# EAGLE board SparkFun RTK Facet - Main (EAGLE 9.6.2)
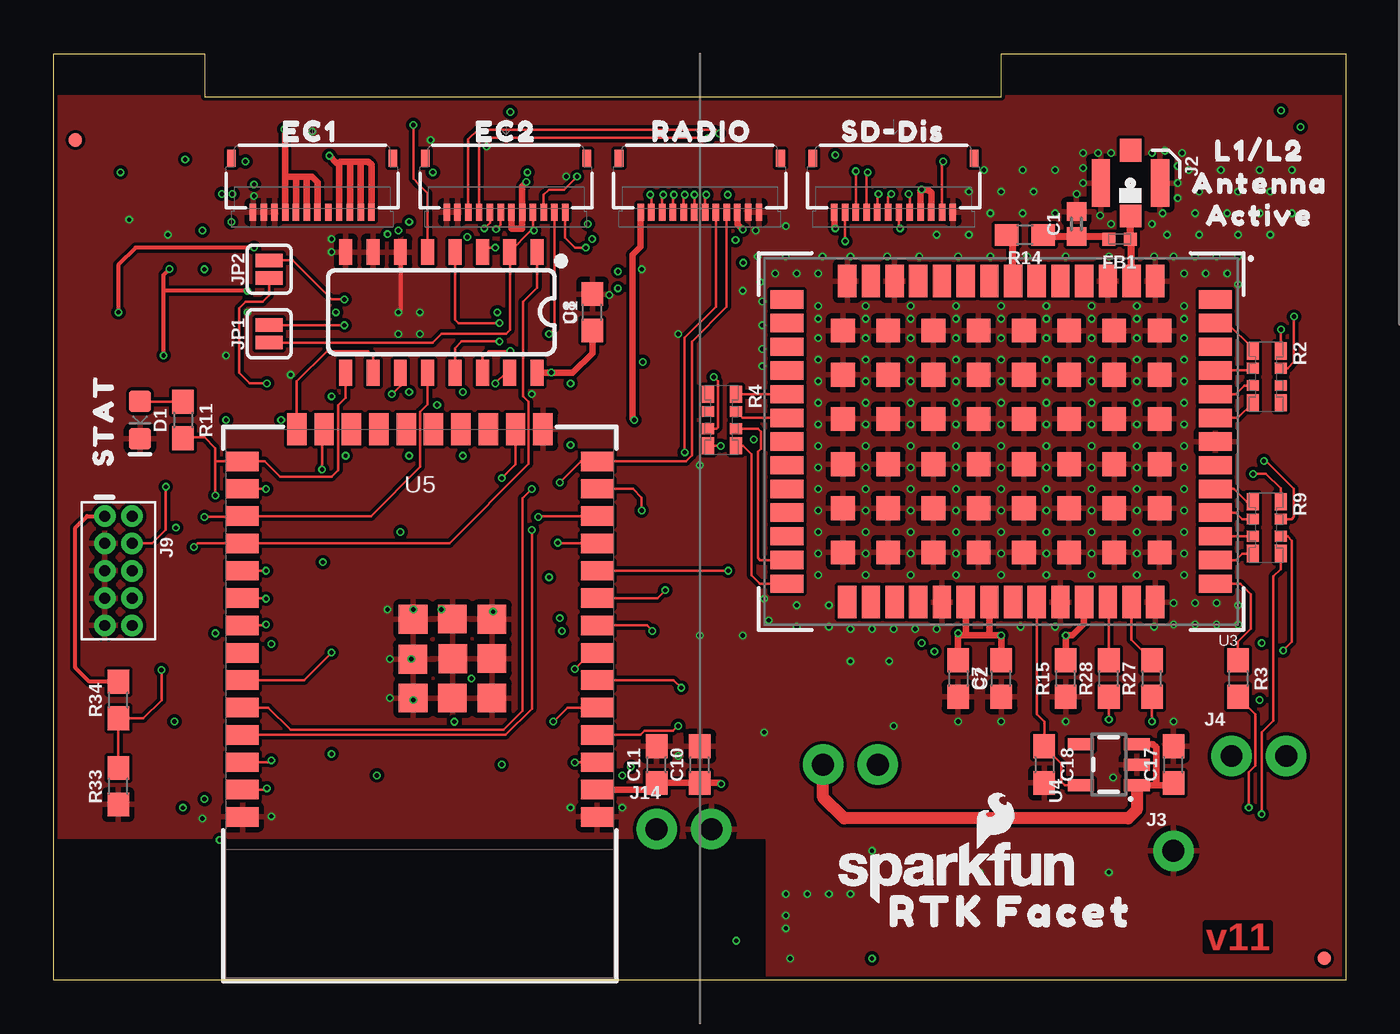
[diagram p0: board, top side]
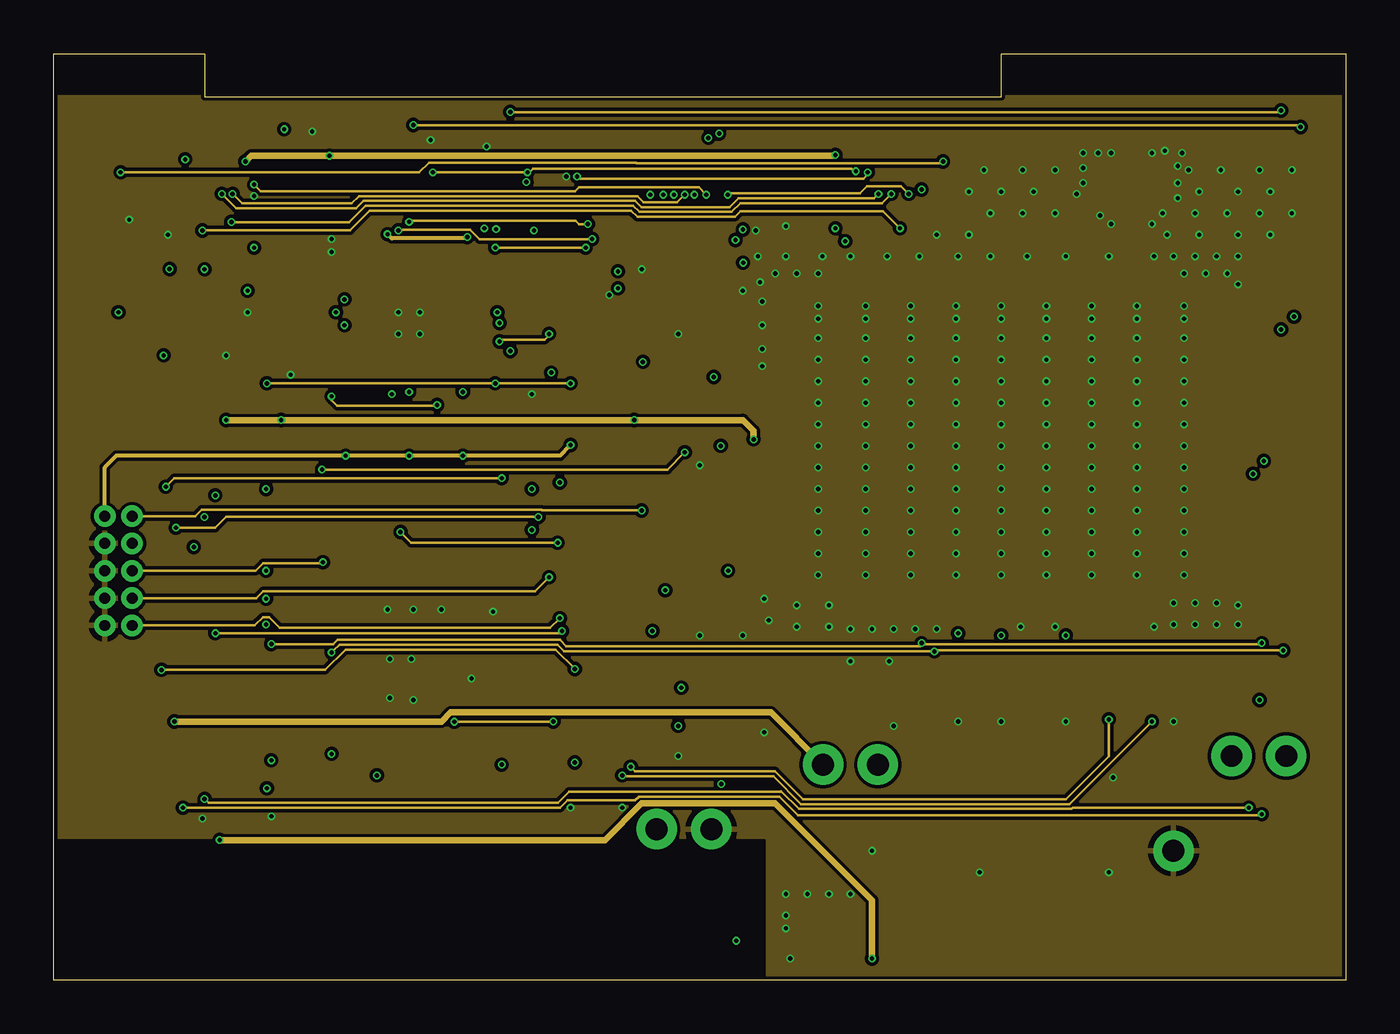
[diagram p1: board, inner layer GND/Horz]
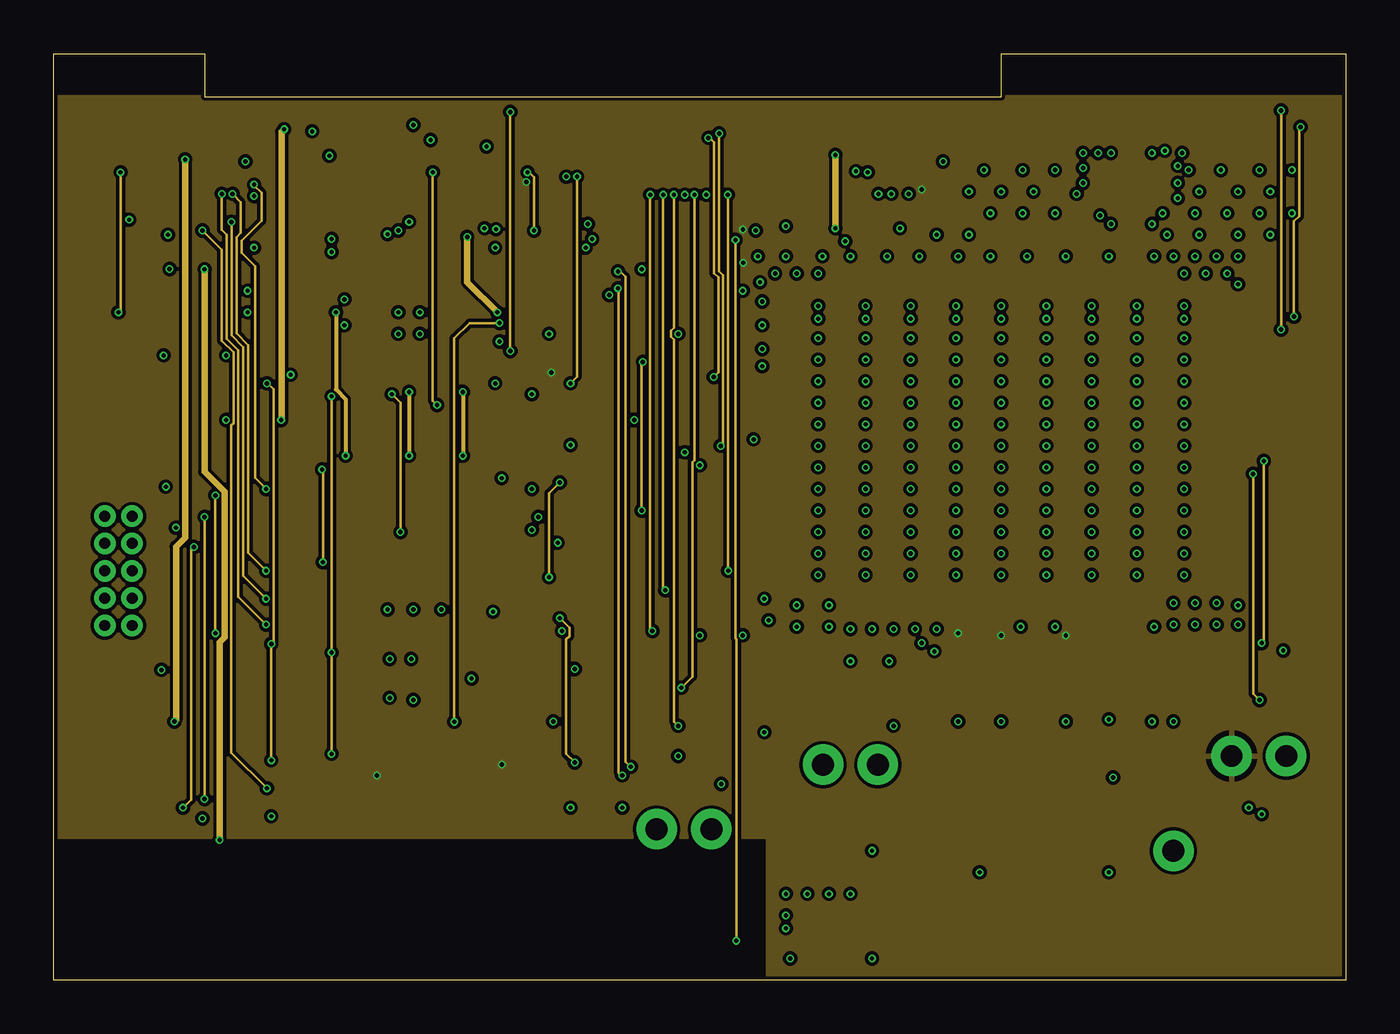
[diagram p2: board, inner layer 3.3V/Vert]
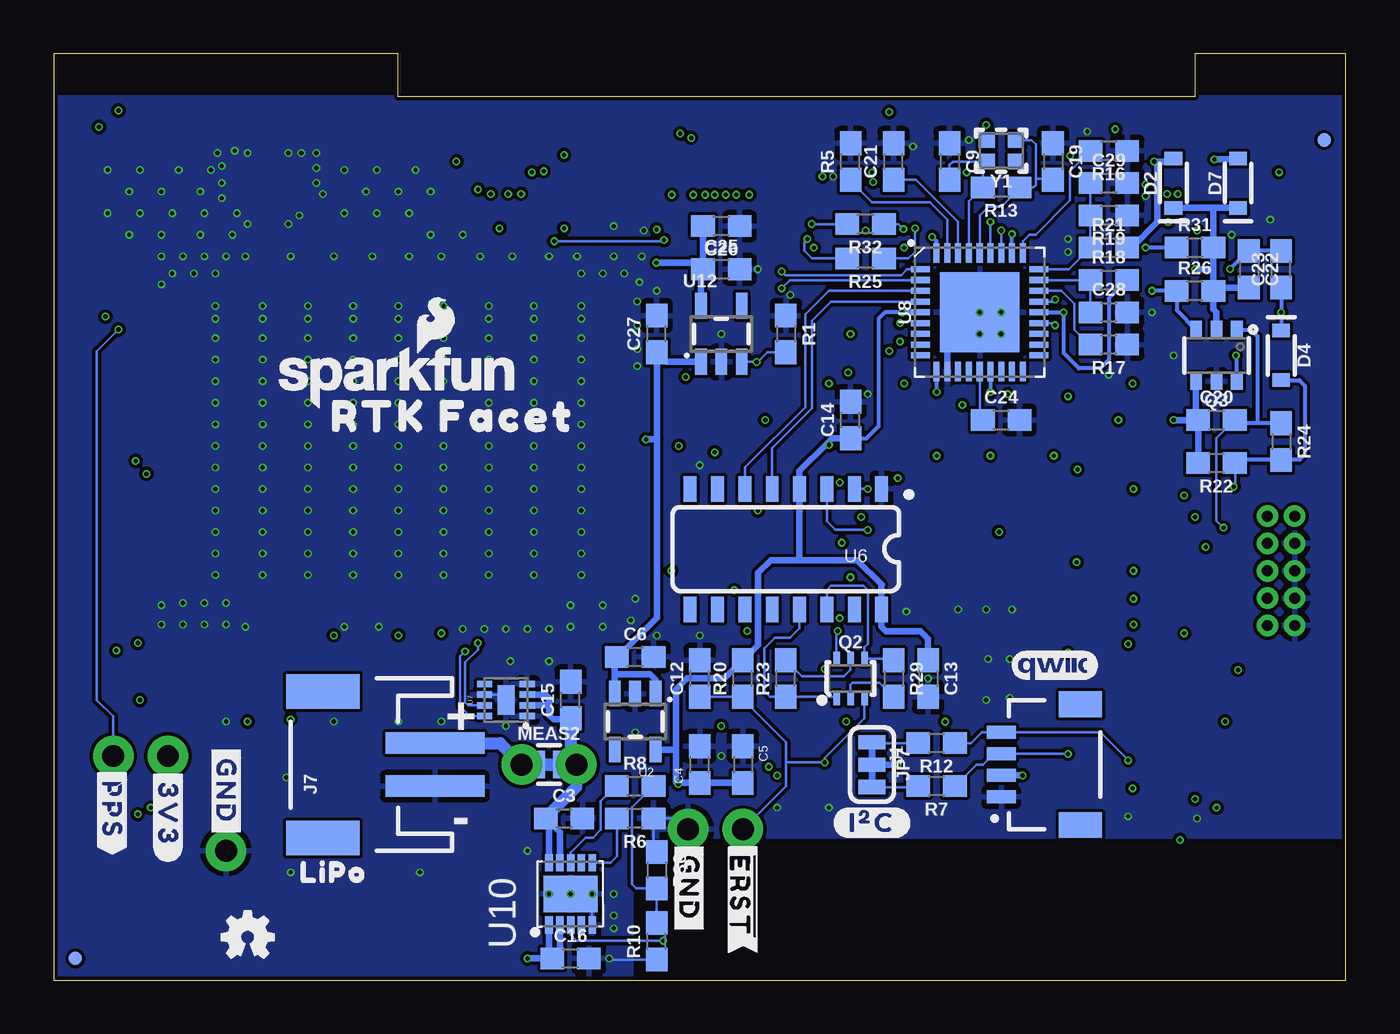
[diagram p3: board, bottom side, seen from below]

Size 60 x 43 mm. Coordinates in mm from the lower left corner, seen from the top.
Outline: 60,43 60,0 0,0 0,43 7,43 7,41 44,41 44,43 60,43
Copper layers (1+2*15+16): Top/Horz 0.035mm / dielectric 1.5mm / GND/Horz 0.035mm / dielectric 0.15mm / 3.3V/Vert 0.035mm / dielectric 0.2mm / Bottom/Vert 0.035mm
Design rules "SparkFun-4-Layer-MicroMod-JLCPCB": minimum track width 4mil, minimum drill 0.2mm, track to track 4mil, track to pad 4mil, pad to pad 4mil, via to via 4mil, smd to smd 4mil, copper to edge 6mil, drill to drill 6mil, minimum pad ring 3mil, minimum via ring 3mil, stop-mask expansion 4mil, vias tented up to drill 25mil, thermal gap 10mil
Net classes: 0 default: width 0 mm, drill 0 mm; 1 power: width 0.178 mm; 2 3.3V: width 0.559 mm; 3 RF: width 0.33 mm, clearance 0.203 mm
tKeepout: area 0,0 to 2,43; area 58,0 to 60,43
bKeepout: area 0,0 to 2,43; area 58,0 to 60,43

## Footprints (pad centres in the part's own frame; a part is rotated, then mirrored left to right if it is on the bottom)
0402 = smd 0.85 x 0.9: 1 -0.58,0; 2 0.58,0
0603 = smd 1.1 x 1: 1 -0.85,0; 2 0.85,0
LED-0603 = smd 1 x 1: A -0.877,0; C 0.877,0
SOD-323 = smd 0.63 x 0.83: A 1.15,0; C -1.15,0
0402-TIGHT = smd 0.6 x 0.6: 1 -0.5,0; 2 0.5,0
JST04_1MM_RA = smd 0.6 x 1.35: 1 -1.5,0; 2 -0.5,0; 3 0.5,0; 4 1.5,0 | smd 1.2 x 2: NC1 2.8,-3.675; NC2 -2.8,-3.675
U.FL = smd 2.2 x 0.85: 1 0,1.375; 2 0,-1.375 | smd 1.05 x 1: FEED 1.525,0; NC -1.525,0
1X01_NO_SILK = drill 1.016 pad 1.88: 1 0,0
1X02_NO_SILK = drill 1.016 pad 1.88: 1 0,0; 2 2.54,0
JST-2-SMD = smd 1 x 4.6: 1 -1,-3.7; 2 1,-3.7 | smd 1.6 x 3.4: NC1 -3.4,1.5; NC2 3.4,1.5
FPC_12_DOUBLESIDED_BACKFLIP = smd 0.3 x 0.8: 1 -2.75,1.35; 2 -2.25,1.35; 3 -1.75,1.35; 4 -1.25,1.35; 5 -0.75,1.35; 6 -0.25,1.35; 7 0.25,1.35; 8 0.75,1.35; 9 1.25,1.35; 10 1.75,1.35; 11 2.25,1.35; 12 2.75,1.35 | smd 0.4 x 0.8: MP1 -3.75,-1.15; MP2 3.75,-1.15
2X5-PTH-1.27MM = drill 0.508 pad 1: 1 -2.54,-0.635; 2 -2.54,0.635; 3 -1.27,-0.635; 4 -1.27,0.635; 5 0,-0.635; 6 0,0.635; 7 1.27,-0.635; 8 1.27,0.635; 9 2.54,-0.635; 10 2.54,0.635
SMT-JUMPER_2_NO_SILK = smd 0.635 x 1.27: 1 -0.406,0; 2 0.406,0
SMT-JUMPER_3_2-NC_TRACE_SILK = smd 0.66 x 1.27: 1 -1.041,0; 2 0,0; 3 1.041,0
FIDUCIAL-MICRO = smd 0.635 x 0.635: 1 0,0
COMBO-JUMPER_2_NC_TRACE = smd 0.635 x 1.27: 1 -0.508,0; 2 0.508,0 | drill 1.016 pad 1.88: 3 -1.27,0; 4 1.27,0
SC70-6 = smd 0.3 x 0.66: 1 -0.65,-0.92; 2 0,-0.92; 3 0.65,-0.92; 4 0.65,0.92; 5 0,0.92; 6 -0.65,0.92
SOT26 = smd 0.55 x 0.8: D1 -0.95,1.2; D2 0.95,1.2; G1 -0.95,-1.2; G2 0.95,-1.2; S1 0,1.2; S2 0,-1.2
1206_RA = smd 0.8 x 0.55: P1 -1.2,-0.62; P4 1.2,-0.62; P5 1.2,0.68; P8 -1.2,0.68 | smd 0.5 x 0.55: P2 -0.4,-0.62; P3 0.4,-0.62; P6 0.4,0.68; P7 -0.4,0.68
SO16 = smd 0.6 x 1.2: 1 -4.445,-2.8; 2 -3.175,-2.8; 3 -1.905,-2.8; 4 -0.635,-2.8; 5 0.635,-2.8; 6 1.905,-2.8; 7 3.175,-2.8; 8 4.445,-2.8; 9 4.445,2.8; 10 3.175,2.8; 11 1.905,2.8; 12 0.635,2.8; 13 -0.635,2.8; 14 -1.905,2.8; 15 -3.175,2.8; 16 -4.445,2.8
SOT23-5 = smd 0.55 x 1.2: 1 -0.95,-1.3; 2 0,-1.3; 3 0.95,-1.3; 4 0.95,1.3; 5 -0.95,1.3
ZED-F9P = smd 0.85 x 1.52: 1 -7.15,-7.45; 2 -6.05,-7.45; 3 -4.95,-7.45; 4 -3.85,-7.45; 5 -2.75,-7.45; 6 -1.65,-7.45; 7 -0.55,-7.45; 8 0.55,-7.45; 9 1.65,-7.45; 10 2.75,-7.45; 11 3.85,-7.45; 12 4.95,-7.45; 13 6.05,-7.45; 14 7.15,-7.45; 28 7.15,7.45; 29 6.05,7.45; 30 4.95,7.45; 31 3.85,7.45; 32 2.75,7.45; 33 1.65,7.45; 34 0.55,7.45; 35 -0.55,7.45; 36 -1.65,7.45; 37 -2.75,7.45; 38 -3.85,7.45; 39 -4.95,7.45; 40 -6.05,7.45; 41 -7.15,7.45 | smd 1.52 x 0.85: 15 9.95,-6.6; 16 9.95,-5.5; 17 9.95,-4.4; 18 9.95,-3.3; 19 9.95,-2.2; 20 9.95,-1.1; 21 9.95,0; 22 9.95,1.1; 23 9.95,2.2; 24 9.95,3.3; 25 9.95,4.4; 26 9.95,5.5; 27 9.95,6.6; 42 -9.95,6.6; 43 -9.95,5.5; 44 -9.95,4.4; 45 -9.95,3.3; 46 -9.95,2.2; 47 -9.95,1.1; 48 -9.95,0; 49 -9.95,-1.1; 50 -9.95,-2.2; 51 -9.95,-3.3; 52 -9.95,-4.4; 53 -9.95,-5.5; 54 -9.95,-6.6 | smd 1.1 x 1.1: 55 -1.05,-1.05; 56 -3.15,-1.05; 57 -5.25,-1.05; 58 -7.35,-1.05; 59 -1.05,-3.1; 60 -3.15,-3.1; 61 -5.25,-3.1; 62 -7.35,-3.1; 63 -1.05,-5.15; 64 -3.15,-5.15; 65 -5.25,-5.15; 66 -7.35,-5.15; 67 -1.05,5.15; 68 -3.15,5.15; 69 -5.25,5.15; 70 -7.35,5.15; 71 -1.05,3.1; 72 -3.15,3.1; 73 -5.25,3.1; 74 -7.35,3.1; 75 -1.05,1.05; 76 -3.15,1.05; 77 -5.25,1.05; 78 -7.35,1.05; 79 1.05,1.05; 80 3.15,1.05; 81 5.25,1.05; 82 7.35,1.05; 83 1.05,3.1; 84 3.15,3.1; 85 5.25,3.1; 86 7.35,3.1; 87 1.05,5.15; 88 3.15,5.15; 89 5.25,5.15; 90 7.35,5.15; 91 1.05,-5.15; 92 3.15,-5.15; 93 5.25,-5.15; 94 7.35,-5.15; 95 1.05,-3.1; 96 3.15,-3.1; 97 5.25,-3.1; 98 7.35,-3.1; 99 1.05,-1.05; 100 3.15,-1.05; 101 5.25,-1.05; 102 7.35,-1.05
ESP-WROOM-32D-NARROW = smd 0.9 x 1.5: 1 6.43,8.238; 2 5.16,8.238; 3 3.89,8.238; 4 2.62,8.238; 5 1.35,8.238; 6 0.08,8.238; 7 -1.19,8.238; 8 -2.46,8.238; 9 -3.73,8.238; 10 -5,8.238; 11 -6.27,8.238; 12 -7.54,8.238; 13 -8.81,8.238; 14 -10.08,8.238; 25 -10.08,-8.238; 26 -8.81,-8.238; 27 -7.54,-8.238; 28 -6.27,-8.238; 29 -5,-8.238; 30 -3.73,-8.238; 31 -2.46,-8.238; 32 -1.19,-8.238; 33 0.08,-8.238; 34 1.35,-8.238; 35 2.62,-8.238; 36 3.89,-8.238; 37 5.16,-8.238; 38 6.43,-8.238 | smd 1.5 x 0.9: 15 -11.57,5.715; 16 -11.57,4.445; 17 -11.57,3.175; 18 -11.57,1.905; 19 -11.57,0.635; 20 -11.57,-0.635; 21 -11.57,-1.905; 22 -11.57,-3.175; 23 -11.57,-4.445; 24 -11.57,-5.715 | smd 1.33 x 1.33: GND1 -0.912,1.531; GNDT1 -2.751,3.346; GNDT2 -2.761,1.516; GNDT3 -2.751,-0.314; GNDT4 -0.891,-0.324; GNDT5 0.909,-0.314; GNDT6 0.909,1.516; GNDT7 0.909,3.346; GNDT8 -0.921,3.346
SO016 = smd 0.6 x 1.2: 1 -4.445,-2.8; 2 -3.175,-2.8; 3 -1.905,-2.8; 4 -0.635,-2.8; 5 0.635,-2.8; 6 1.905,-2.8; 7 3.175,-2.8; 8 4.445,-2.8; 9 4.445,2.8; 10 3.175,2.8; 11 1.905,2.8; 12 0.635,2.8; 13 -0.635,2.8; 14 -1.905,2.8; 15 -3.175,2.8; 16 -4.445,2.8
DFN-8 = smd 0.3 x 0.7: 1 -0.75,-0.99; 2 -0.25,-0.99; 3 0.25,-0.99; 4 0.75,-0.99; 5 0.75,0.99; 6 0.25,0.99; 7 -0.25,0.99; 8 -0.75,0.99 | smd 1.38 x 0.8: 9 0,0
QFN-36 = smd 0.9 x 0.28: 1 -2.75,2; 2 -2.75,1.5; 3 -2.75,1; 4 -2.75,0.5; 5 -2.75,0; 6 -2.75,-0.5; 7 -2.75,-1; 8 -2.75,-1.5; 9 -2.75,-2; 19 2.75,-2; 20 2.75,-1.5; 21 2.75,-1; 22 2.75,-0.5; 23 2.75,0; 24 2.75,0.5; 25 2.75,1; 26 2.75,1.5; 27 2.75,2 | smd 0.28 x 0.9: 10 -2,-2.75; 11 -1.5,-2.75; 12 -1,-2.75; 13 -0.5,-2.75; 14 0,-2.75; 15 0.5,-2.75; 16 1,-2.75; 17 1.5,-2.75; 18 2,-2.75; 28 2,2.75; 29 1.5,2.75; 30 1,2.75; 31 0.5,2.75; 32 0,2.75; 33 -0.5,2.75; 34 -1,2.75; 35 -1.5,2.75; 36 -2,2.75 | smd 3.7 x 3.7: EP 0,0
DFN-10 = smd 0.8 x 0.35: 1 -1.45,1; 2 -1.45,0.5; 3 -1.45,0; 4 -1.45,-0.5; 5 -1.45,-1; 6 1.45,-1; 7 1.45,-0.5; 8 1.45,0; 9 1.45,0.5; 10 1.45,1 | smd 1.7 x 2.5: 11 0,0
CRYSTAL-SMD-2.0X1.6MM = smd 0.75 x 0.7: 1 -0.675,-0.5; 2 0.675,-0.5; 3 0.675,0.5; 4 -0.675,0.5

## Placement (x,y rotation side)
C1  47pF  [0402]  47.5,35.1 90 top
C2  1.0uF  [0603]  42,14 270 top
C3  4.7uF  [0603]  36.3,7.5 0 bottom
C4  1.0uF  [0603]  30,10 90 bottom
C5  0.1uF  [0603]  28,10 270 bottom
C6  1.0uF  [0603]  33,15 0 bottom
C7  0.1uF  [0603]  44,14 90 top
C8  0.1uF  [0603]  25.01,31 90 top
C9  18pF  [0603]  18.4,38 270 bottom
C10  10uF  [0603]  30,10 90 top
C11  0.1uF  [0603]  28,10 90 top
C12  0.1uF  [0603]  30,14 90 bottom
C13  0.1uF  [0603]  19.4,14 270 bottom
C14  10uF  [0603]  23,26 90 bottom
C15  0.1uF  [0603]  36,13 90 bottom
C16  4.7uF  [0603]  36,1 0 bottom
C17  1.0uF  [0603]  52,10 90 top
C18  1.0uF  [0603]  46,10 270 top
C19  18pF  [0603]  13.6,38 270 bottom
C20  22uF  [0603]  6,26 0 bottom
C21  0.1uF  [0603]  21,38 90 bottom
C22  0.1uF  [0603]  4.5,33 270 bottom
C23  0.1uF  [0603]  3,33 90 bottom
C24  0.1uF  [0603]  16,26 0 bottom
C25  1.0uF  [0603]  29,33 0 bottom
C26  0.1uF  [0603]  29,35 180 bottom
C27  1.0uF  [0603]  32,30 90 bottom
C28  0.1uF  [0603]  11,31 0 bottom
C29  0.1uF  [0603]  11,37 0 bottom
D1  Yellow  [LED-0603]  4,26 270 top
D2  3A/10V/280mV  [SOD-323]  8,37 90 bottom
D4  250mA/100V  [SOD-323]  3,29 270 bottom
D7  3A/10V/280mV  [SOD-323]  5,37 90 bottom
FB1  2.66Ω  [0402-TIGHT]  49.5,34.4 180 top
FRAME1  FRAME-LEDGER  [CREATIVE_COMMONS]  82.04,6 0 top  (outside the outline)
FRAME2  FRAME-LEDGER  [CREATIVE_COMMONS]  82.04,6 0 top  (outside the outline)
J1  QWIIC_RIGHT_ANGLE  [JST04_1MM_RA]  16,10 90 bottom
J2  U.FL  [U.FL]  50,37 270 top
J3  [1X01_NO_SILK]  52,6 0 top
J4  [1X02_NO_SILK]  54.7,10.4 0 top
J7  [JST-2-SMD]  46,10 90 bottom
J8  [FPC_12_DOUBLESIDED_BACKFLIP]  39,37 180 top
J9  CORTEX_JTAG_DEBUG_PTH  [2X5-PTH-1.27MM]  3,19 270 top
J10  [FPC_12_DOUBLESIDED_BACKFLIP]  30,37 180 top
J14  [1X02_NO_SILK]  28,7 0 top
J15  [FPC_12_DOUBLESIDED_BACKFLIP]  12,37 180 top
J18  [FPC_12_DOUBLESIDED_BACKFLIP]  21,37 180 top
JP1  [SMT-JUMPER_2_NO_SILK]  10,30 90 top
JP2  [SMT-JUMPER_2_NO_SILK]  10,33 90 top
JP7  JUMPER-SMT_3_2-NC_TRACE_SILK  [SMT-JUMPER_3_2-NC_TRACE_SILK]  22,10 270 bottom
JP21  FIDUCIALUFIDUCIAL  [FIDUCIAL-MICRO]  59,1 0 top
JP61  FIDUCIALUFIDUCIAL  [FIDUCIAL-MICRO]  1,39 0 top
JP71  FIDUCIALUFIDUCIAL  [FIDUCIAL-MICRO]  59,1 0 bottom
JP81  FIDUCIALUFIDUCIAL  [FIDUCIAL-MICRO]  1,39 0 bottom
LOGO1  OSHW-LOGOMINI  [OSHW-LOGO-MINI]  51,2 0 bottom
LOGO2  SFE_LOGO_NAME_FLAME.1_INCH  [SFE_LOGO_NAME_FLAME_.1]  42,5 0 top
LOGO3  SFE_LOGO_NAME_FLAME.1_INCH  [SFE_LOGO_NAME_FLAME_.1]  44,28 0 bottom
MEAS2  [COMBO-JUMPER_2_NC_TRACE]  37,10 0 bottom
Q2  MBT3904DW1T1  [SC70-6]  23,14 0 bottom
Q3  SIL2308  [SOT26]  6,29 180 bottom
R1  100k  [0603]  26,30 270 bottom
R2  33  [1206_RA]  56.3,28 270 top
R3  33  [0603]  55,14 270 top
R4  33  [1206_RA]  31,26 270 top
R5  12k  [0603]  23,38 90 bottom
R6  1k  [0603]  33,7.5 180 bottom
R7  2.2k  [0603]  19,9 180 bottom
R8  0  [0603]  33,9 0 bottom
R9  33  [1206_RA]  56.3,21 270 top
R10  10k  [0603]  32,1.8 90 bottom
R11  1k  [0603]  6,26 270 top
R12  2.2k  [0603]  19,11 180 bottom
R13  1M  [0603]  16,36.8 180 bottom
R14  10  [0603]  45.1,34.6 180 top
R15  100k  [0603]  47,14 90 top
R16  100k  [0603]  11,38.5 180 bottom
R17  100k  [0603]  11,29.5 180 bottom
R18  100k  [0603]  11,32.5 0 bottom
R19  100k  [0603]  11,35.5 180 bottom
R20  10k  [0603]  28,14 90 bottom
R21  100k  [0603]  11,34 0 bottom
R22  10k  [0603]  6,24 180 bottom
R23  10k  [0603]  26,14 90 bottom
R24  300k  [0603]  3,25 270 bottom
R25  22  [0603]  22.3,33.5 180 bottom
R26  100k  [0603]  7,32 0 bottom
R27  27  [0603]  51,14 90 top
R28  27  [0603]  49,14 90 top
R29  10k  [0603]  21,14 270 bottom
R30  150k  [0603]  32,5.1 270 bottom
R31  10k  [0603]  7,34 0 bottom
R32  22  [0603]  22.3,35.1 180 bottom
R33  10k  [0603]  3,9 90 top
R34  10k  [0603]  3,13 90 top
U1  74HC4052D  [SO16]  18,31 180 top
U2  3.3V  [SOT23-5]  33,12 180 bottom
U3  U-BLOX_ZED-F9P  [ZED-F9P]  44,25 180 top
U4  STLQ015  [SOT23-5]  49,10 90 top
U5  ESP-WROOM-3232D-NARROW  [ESP-WROOM-32D-NARROW]  17,14 270 top
U6  CH340C  [SO016]  26,20 180 bottom
U7  MAX17048  [DFN-8]  39,13 90 bottom
U8  USB251XB  [QFN-36]  17,31 0 bottom
U10  MCP73833  [DFN-10]  36,4 90 bottom
U12  AP2112K-3.3  [SOT23-5]  29,30 0 bottom
U$1  [LIPO0]  47,5 0 bottom
U$2  SPECIAL_INSTRUCTIONS-ORDERING  [ORDERING_INSTRUCTIONS]  62.54,81.28 0 top  (outside the outline)
U$3  [EC21]  21,39.4 0 top
U$4  [SD#DIS0]  39,39.4 0 top
U$5  [ACTIVE1]  56,35.5 0 top
U$6  [#3V3#0]  54.7,7.7 270 bottom
U$7  [ANTENNA2]  56,37 0 top
U$8  [EC10]  11.9,39.4 0 top
U$9  [L1#L20]  56,38.5 0 top
U$10  [#PPS#1]  57.3,7.9 270 bottom
U$11  [RTK_FACET0]  44.45,3.17 0 top
U$12  [RADIO0]  30.1,39.4 0 top
U$13  [RTK_FACET0]  41.45,26.18 0 bottom
U$14  [#GND#1]  52,11 270 bottom
U$24  [STAT0]  2.3,26 90 top
U$25  [#I�C#0]  22,7.3 0 bottom
U$26  [##ERST##0]  28,3.9 270 bottom
U$30  [QWIIC_4MM]  13.5,14.6 0 bottom
U$84  [#GND#1]  30.5,6.5 270 bottom
Y1  24MHz  [CRYSTAL-SMD-2.0X1.6MM]  16,38.5 180 bottom

## Library data of the parts
C1 = SparkFun-Capacitors; PROD_ID: CAP-15063
C2 C4 C6 C17 C18 C25 C27 = SparkFun-Capacitors; PROD_ID: CAP-13930
C3 C16 = SparkFun-Capacitors; PROD_ID: CAP-14106
C5 C7 C21-C24 C26 C28 C29 = SparkFun-Capacitors; PROD_ID: CAP-08604
C8 C11-C13 C15 = SparkFun-Capacitors; PROD_ID: CAP-00810
C9 C19 = SparkFun-Capacitors; PROD_ID: CAP-08267
C10 C14 = SparkFun-Capacitors; PROD_ID: CAP-11015
C20 = SparkFun-Capacitors; PROD_ID: CAP-14464
D1 = SparkFun-LED; PROD_ID: DIO-09003
D2 D7 = SparkFun-DiscreteSemi; PROD_ID: DIO-14072
D4 = SparkFun-DiscreteSemi; PROD_ID: DIO-09646
FB1 = SparkFun-Coils; PROD_ID: NDUC-15072
FRAME1 FRAME2 JP21 JP61 JP71 JP81 LOGO1-LOGO3 U$2 U$30 = SparkFun-Aesthetics
J1 = SparkFun-Connectors; PROD_ID: CONN-13694
J2 = SparkFun-Connectors; PROD_ID: CONN-09193; SF_ID: WRL-09144
J3 J4 J9 J14 = SparkFun-Connectors
J7 = SparkFun-Connectors; PROD_ID: CONN-11443; SF_ID: PRT-08612
J8 J10 J15 J18 = RTK Facet; PROD_ID: CONN-15766
JP1 JP2 JP7 MEAS2 = SparkFun-Jumpers
Q2 = SparkFun-DiscreteSemi; PROD_ID: TRANS-13337
Q3 = SparkFun-DiscreteSemi; PROD_ID: TRANS-15717
R1 R15-R19 R21 R26 = SparkFun-Resistors; PROD_ID: RES-07828
R2 R4 R9 = SparkFun-Resistors; PROD_ID: RES-15081
R3 = SparkFun-Resistors; PROD_ID: RES-08270
R5 = SparkFun-Resistors; PROD_ID: RES-10327
R6 R11 = SparkFun-Resistors; PROD_ID: RES-07856
R7 R12 = SparkFun-Resistors; PROD_ID: RES-08272
R8 = SparkFun-Resistors; PROD_ID: RES-08609
R10 = SparkFun-Resistors; PROD_ID: RES-13608
R13 = SparkFun-Resistors; PROD_ID: RES-07868
R14 = SparkFun-Resistors; PROD_ID: RES-12581
R20 R22 R23 R29 R31 R33 R34 = SparkFun-Resistors; PROD_ID: RES-00824
R24 = SparkFun-Resistors; PROD_ID: RES-10809
R25 R32 = SparkFun-Resistors; PROD_ID: RES-08698
R27 R28 = SparkFun-Resistors; PROD_ID: RES-09334
R30 = SparkFun-Resistors; PROD_ID: RES-09117
U1 = SparkFun-IC-Logic; PROD_ID: IC-13103
U2 U12 = SparkFun-IC-Power; PROD_ID: VREG-12457
U3 = SparkFun-GPS; PROD_ID: IC-14209
U4 = SparkFun-IC-Power; PROD_ID: IC-15779
U5 = SparkFun-RF; PROD_ID: IC-15676
U6 = SparkFun-IC-Comms; PROD_ID: IC-14038
U7 = SparkFun-IC-Power; PROD_ID: IC-12551
U8 = USB251xB; PROD_ID: IC-15827
U10 = SparkFun-IC-Power; PROD_ID: IC-14369
U$1 U$3-U$14 U$24-U$26 U$84 = output
Y1 = SparkFun-Clocks; PROD_ID: XTAL-14845

## Nets
3.3V [power]: C2.1 C7.2 C8.1 C25.1 C26.2 J1.2 J4.1 J8.3 J8.4 J10.3 J18.5 J18.6 JP7.2 R15.2 U1.16 U3.33 U3.34 U3.38 U12.5
ANT_VCC: C1.1 FB1.2 R14.1
CHG_LED: J8.11 U10.3
CHG_THERM1: R8.2 R10.2 R30.2
ESP32_!DTR: Q2.1 R23.1 U6.13
ESP32_!RTS: Q2.4 R29.1 U6.14
ESP32_EN: C12.1 J9.10 J14.1 Q2.3 R20.1 U5.3
ESP32_RXI: U5.34 U6.2
ESP32_TXO: U5.35 U6.3
ESP_0/BOOT/STAT_LED/MUX_B: Q2.6 R11.2 U1.9 U5.25
ESP_2/MUX_A: U1.10 U5.24
ESP_3V3 [power]: C4.1 C5.2 C10.1 C11.1 C13.1 C14.1 J9.1 R18.2 R20.2 R34.2 U2.5 U5.2 U6.4 U6.16 U8.5 U8.10 U8.15 U8.23 U8.29 U8.36
ESP_4/RADIO_PWR_ON: J10.6 U5.26
ESP_5/RADIO_CTSI: J10.8 U5.29
ESP_12/MTDI/RADIO_NI: J9.8 J10.4 U5.14
ESP_13/POWER_CTRL/MTCK: D4.A J9.4 R22.1 R24.2 U5.16
ESP_14/PERIPHERAL_POWER/MTMS: J9.2 R1.2 U5.13 U12.3
ESP_15/MTDO/RADIO_!RESET!: J9.6 J10.5 U5.23
ESP_16/ZED-TXO1: R3.2 U1.12 U5.27
ESP_17/ZED-RXI1: R9.P5 U1.1 U5.28
ESP_18/SD_SCK: J8.7 U5.30
ESP_19/SD_CIPO: J8.8 U5.31
ESP_21/SDA: J1.3 J8.10 J18.4 JP1.1 R7.1 R9.P6 U1.2 U5.33 U7.8
ESP_22/SCL: J1.4 J8.9 J18.3 JP2.1 R9.P7 R12.1 U1.15 U5.36 U7.7
ESP_23/SD_COPI: J8.6 U5.37
ESP_25/SD_!CS!: J8.5 U5.10
ESP_26/DAC2: U1.11 U5.11
ESP_27/FAST_OFF: C20.2 Q3.G1 R24.1 U5.12
ESP_32/RADIO_TXO: J10.11 U5.8
ESP_33/RADIO_RXI: J10.10 U5.9
ESP_DM: U6.6 U8.3
ESP_DP: U6.5 U8.4
ESP_I34/RADIO_INT: J10.7 U5.6
ESP_I35/DEVICE_SENSE: R33.2 R34.1 U5.7
ESP_I36/RADIO_RTSO: J10.9 U5.4
ESP_I39/ADC39: U1.4 U5.5
EXTERNAL_SERIAL1_RXI: J18.1 U1.3
EXTERNAL_SERIAL1_TXO: J18.2 U1.13
FENCE_LV: R4.P8 U3.19
GND: C1.2 C2.2 C3.2 C4.2 C5.1 C6.2 C7.1 C8.2 C9.1 C10.2 C11.2 C12.2 C13.2 C14.2 C15.2 C16.2 C17.2 C18.2 C19.1 C21.2 C24.2 C25.2 C26.1 C27.2 C28.2 C29.2 D1.C J1.1 J2.1 J2.2 J3.1 J7.1 J8.1 J9.3 J9.5 J9.7 J9.9 J10.1 J10.2 J14.2 J15.10 J15.11 J15.12 J18.11 J18.12 Q3.S1 R1.1 R5.2 R6.1 R10.1 R15.1 R16.1 R17.1 R19.1 R30.1 R33.1 U1.6 U1.7 U1.8 U2.2 U3.1 U3.3 U3.12 U3.14 U3.32 U3.37 U3.41 U3.48 U3.55 U3.56 U3.57 U3.58 U3.59 U3.60 U3.61 U3.62 U3.63 U3.64 U3.65 U3.66 U3.67 U3.68 U3.69 U3.70 U3.71 U3.72 U3.73 U3.74 U3.75 U3.76 U3.77 U3.78 U3.79 U3.80 U3.81 U3.82 U3.83 U3.84 U3.85 U3.86 U3.87 U3.88 U3.89 U3.90 U3.91 U3.92 U3.93 U3.94 U3.95 U3.96 U3.97 U3.98 U3.99 U3.100 U3.101 U3.102 U4.2 U5.1 U5.15 U5.38 U5.GND1 U5.GNDT1 U5.GNDT2 U5.GNDT3 U5.GNDT4 U5.GNDT5 U5.GNDT6 U5.GNDT7 U5.GNDT8 U6.1 U7.1 U7.4 U7.6 U7.9 U8.11 U8.EP U10.5 U10.11 U12.2
GPS_ANT1 [RF]: FB1.1 J2.FEED U3.2
LIPO_RAW: J7.2 MEAS2.1 MEAS2.3
N$1: R8.1 U10.8
N$2: D1.A R11.1
N$3: JP7.3 R7.2
N$4: JP7.1 R12.2
N$5: R2.P2 U3.51
N$6: C22.1 C23.2 Q3.D1 Q3.G2 R26.1
N$7: C9.2 R13.2 U8.33 Y1.3
N$8: C19.2 R13.1 U8.32 Y1.1
N$9: R5.1 U8.35
N$10: R16.2 U8.28
N$11: R27.2 U3.40
N$12: R28.2 U3.39
N$13: R14.2 U3.7
N$14: R17.2 U8.25
N$15: C21.1 U8.34
N$16: R2.P4 U3.49
N$17: C24.1 U8.14
N$18: R2.P3 U3.50
N$19: R25.2 U8.30
N$20: R32.2 U8.31
N$21: JP1.2 U8.22
N$22: R9.P1 U3.46
N$23: JP2.2 U8.24
N$24: Q2.5 R23.2
N$25: Q2.2 R29.2
POWER_BTN: C23.1 D4.C J8.2 R31.1
PPS: R2.P1 U3.53
PROG1: R6.2 U10.6
RTK_LV: R4.P7 U3.20
RX2_LV: R4.P6 U3.26
RXLV: R9.P4 U3.43
SCL_LV: R9.P2 U3.45
SDA_LV: R9.P3 U3.44
TX2_LV: R4.P5 U3.27
TXLV: R3.1 U3.42
USB_!RESET: C28.1 R18.1 U8.26
USB_DM: J18.8 R25.1
USB_DP: J18.7 R32.1
V_BATT [power]: C3.1 C15.1 C17.1 D7.A MEAS2.2 MEAS2.4 U4.1 U4.3 U7.2 U7.3 U10.9 U10.10
V_RAW [power]: C16.1 C22.2 D2.C D7.C Q3.S2 R26.2 R31.2 U10.1 U10.2
V_USB [power]: D2.A J8.12 J15.1 J15.2 J15.3 J15.4 R21.2
VBUS_DET: C29.1 R19.2 R21.1 U8.27
VOUT [power]: C6.1 C20.1 C27.1 J10.12 J15.6 J15.7 J15.8 J15.9 Q3.D2 R22.2 U2.1 U2.3 U12.1
ZED-RXI2: J18.9 R4.P3
ZED-TXO2: J18.10 R4.P4
ZED_!RESET!: R2.P5
ZED_!SAFE!: R2.P6
ZED_BACKUP: C18.1 U3.36 U4.5
ZED_DM: R28.1 U8.1
ZED_DP: R27.1 U8.2
ZED_EXTINT: R2.P7 U1.5
ZED_FENCE_STAT: R4.P1
ZED_PPS_STAT: J4.2 R2.P8 U1.14
ZED_RTK_STAT: R4.P2
ZED_TX_READY: R9.P8

## Tracks (layer width: path | path; a pad name or v marks a point on that pad's centre or on a via)
3.3V  (via drill 0.2)
  Top/Horz 0.305: U1.16 v23.1,28.2 24.1,28.2 25.01,29.11 C8.1 | C2.1 v42,16.1 42.1,16 42.4,16 | C7.2 v44,16 43.5,16 | 42.4,16 43.5,16 | 42.4,16 42.35,16.05 U3.33 | 43.5,16 43.45,16.05 U3.34 | U3.38 47.85,16.55 47.3,16 v47,16 R15.2 | v21.94,37.04 21.75,36.85 J18.5 21.75,34.87 21.27,34.87 21.25,34.89 J18.6 | J8.4 40.25,36.65 v40.3,36.7 40.6,36.7 40.75,36.55 J8.3 | J10.3 31.75,35.09 v32,34.84
  Bottom/Vert 0.305: C26.2 29.85,33.3 | 29.85,33.3 C25.1 29.95,32.9 U12.5 | v32.02,33.3 29.85,33.3 | J1.2 v15,9.5 | JP7.2 v20.8,10
  pour 3.3V/Vert (isolate 0.152, rank 4): 0,41 60,41 60,0 0,0
ANT_VCC
  Top/Horz 0.305: R14.1 46.03,34.52 | 48.88,34.52 FB1.2
  Top/Horz 0.33: 46.03,34.52 C1.1 48.88,34.52
CHG_LED  (via drill 0.2)
  Top/Horz 0.127: v36.75,34.3 J8.11
  3.3V/Vert 0.127: v31.7,1.82 31.7,15.82 31.66,15.86 v31.66,34.36
  Bottom/Vert 0.127: U10.3 36,2.1 35.72,1.82 v31.7,1.82 | v31.66,34.36 31.72,34.3 v36.75,34.3
CHG_THERM1
  Bottom/Vert 0.127: R10.2 R30.2 32.95,4.25 33.13,4.43 33.13,8.02 R8.2
ESP32_!DTR
  Bottom/Vert 0.127: Q2.1 23.72,13.15 R23.1 26.75,13.15 27,13.4 27,15.4 26.5,15.9 25.8,15.9 25.36,16.34 U6.13
ESP32_!RTS
  Bottom/Vert 0.127: R29.1 21.07,14.92 Q2.4 22.35,15.46 22.2,15.61 22.2,18.1 22.4,18.3 23.9,18.3 24.09,18.11 U6.14
ESP32_EN  (via drill 0.2)
  Top/Horz 0.127: U5.3 25.23,10.1 v24.2,10.1
  GND/Horz 0.127: J9.10 9.34,16.46 9.72,16.84 10,16.84 10.48,16.36 23.06,16.36 v23.5,16.8
  3.3V/Vert 0.127: v23.5,16.8 23.94,16.36 23.94,15.96 23.8,15.82 23.8,10.5 v24.2,10.1
  Bottom/Vert 0.127: R20.1 28.1,13.15 | 28.1,13.15 C12.1 | 28.1,13.15 26,11.05 26,10.1 | 26,10.1 v24.2,10.1 24.2,10.3 22.35,12.15 Q2.3 | 26,10.1 26,9 J14.1
ESP32_RXI  (via drill 0.2)
  Top/Horz 0.127: v22.2,22.8 21.77,22.37 21.77,12.49 20.89,11.61 10.99,11.61 9.95,12.65 U5.34
  Bottom/Vert 0.127: v22.2,22.8 U6.2
ESP32_TXO  (via drill 0.2)
  Top/Horz 0.127: v22.2,20.9 22.2,12.6 20.98,11.38 U5.35
  Bottom/Vert 0.127: v22.2,20.9 23.7,20.9 24.09,21.3 U6.3
ESP_0/BOOT/STAT_LED/MUX_B  (via drill 0.2)
  Top/Horz 0.127: R11.2 6.05,25.2 7,25.2 7.5,24.7 7.5,24.1 | v7.5,22.5 7.5,24.1 | 7.5,24.1 7.52,24.08 U5.25 9.8,24.08 10.52,23.36 12.9,23.36 13.21,23.67 13.21,26.69 13.55,27.03 U1.9
  GND/Horz 0.127: v23.6,16.2 23.5,16.1 v7.5,16.1
  3.3V/Vert 0.127: v7.5,16.1 v7.5,22.5
  Bottom/Vert 0.127: v23.6,16.2 23.65,16.15 Q2.6
ESP_2/MUX_A
  Top/Horz 0.127: U5.24 11.29,27.8 12.68,29.2 14.6,29.2 14.82,28.98 U1.10
ESP_3V3  (via drill 0.2)
  Top/Horz 0.178: R34.2 1.65,13.85 1,14.5 1,21 1.54,21.54 J9.1
  Top/Horz 0.305: v31,9.1 30.95,9.15 C10.1 C11.1 27.69,8.84 U5.2
  GND/Horz 0.178: J9.1 2.37,23.8 2.91,24.34 v13.55,24.34 v16.5,24.34 v19,24.34 23.5,24.34 v24,24.84 | v19.2,34.5 19.2,34.48 19.15,34.43 15.69,34.43 v15.5,34.63
  3.3V/Vert 0.178: v13.1,31 13.1,27.42 13.55,26.97 v13.55,24.34 | v16.5,27.3 v16.5,24.34 | v19,27.3 v19,24.34
  3.3V/Vert 0.305: v19.2,34.5 19.2,32.4 v20.6,31
  Bottom/Vert 0.178: U8.10 v19,27.3 | C14.1 22.25,25.15 21.7,25.7 21.7,30.7 21.4,31 v20.6,31 U8.5 | U8.36 19,34.3 v19.2,34.5 | U8.29 v15.5,34.63 | U8.23 v13.1,31 13.1,29.1 12.4,28.4 11.4,28.4 11,28.8 11,31.65 R18.2 | U8.15 v16.5,27.3
  Bottom/Vert 0.305: 31.1,10.7 31.1,13.5 30.6,14 28.85,14 R20.2 27.3,15.55 27.3,18.9 26.7,19.5 25.4,19.5 | 31.1,10.7 31.1,9.2 v31,9.1 30.95,9.15 C10.1 C11.1 | U2.5 31.1,10.7 | 31.1,10.7 | C13.1 19.4,15.85 19.75,16.2 21.36,16.2 21.55,16.4 U6.16 21.55,18.34 21.55,18.35 22.7,19.5 25.4,19.5 | 25.4,19.5 25.36,19.54 U6.4 25.36,23.64 24.1,24.9 | C14.1 23.85,25.15 24.1,24.9 | v24,24.84 24.06,24.9 24.1,24.9
ESP_4/RADIO_PWR_ON  (via drill 0.2)
  Top/Horz 0.127: J10.6 30.25,36.41 v30.3,36.46 | v9.86,22.8 8.77,22.8 U5.26
  GND/Horz 0.127: v30.3,36.46 29.96,36.8 24.38,36.8 24.21,36.63 9.6,36.63 v9.3,36.93
  3.3V/Vert 0.127: v9.3,36.93 9.3,36.88 9.64,36.54 9.64,35.24 8.71,34.31 8.71,33.77 9.34,33.14 9.34,23.32 v9.86,22.8
ESP_5/RADIO_CTSI  (via drill 0.2)
  Top/Horz 0.127: J10.8 29.25,36.41 v29.3,36.46 | v9.86,19 U5.29
  GND/Horz 0.127: v8.3,36.5 8.74,36.06 13.84,36.06 14.18,36.4 27.1,36.4 27.38,36.12 28.94,36.12 29.28,36.46 v29.3,36.46
  3.3V/Vert 0.127: v8.3,36.5 8.69,36.11 8.69,34.69 8.49,34.49 8.49,30.02 9.03,29.48 9.03,19.83 v9.86,19
ESP_12/MTDI/RADIO_NI  (via drill 0.2)
  Top/Horz 0.127: v23.5,23.1 24.48,24.08 U5.14 29.36,24.08 29.64,24.36 29.64,29.64 31.25,31.25 J10.4
  GND/Horz 0.127: J9.8 9.41,17.73 9.72,18.04 22.34,18.04 v23,18.7
  3.3V/Vert 0.127: v23,18.7 23,22.6 v23.5,23.1
ESP_13/POWER_CTRL/MTCK  (via drill 0.2)
  Top/Horz 0.127: J9.4 4.57,20.27 5.2,20.9 v5.2,22.9 | U5.16 21.45,23.95 v20.8,23.3
  GND/Horz 0.127: v20.8,23.3 5.6,23.3 v5.2,22.9
  Bottom/Vert 0.127: v5.2,22.9 5.12,22.98 5.12,24.02
  Bottom/Vert 0.178: D4.A 2.15,27.85 1.9,27.6 1.9,24.4 2.15,24.15 R24.2 5,24.15 5.12,24.02 R22.1
ESP_14/PERIPHERAL_POWER/MTMS  (via drill 0.2)
  Top/Horz 0.127: U5.13 26.89,22.81 27.3,22.4 v27.3,21.8
  GND/Horz 0.127: J9.2 6.56,21.54 6.86,21.84 22.64,21.84 22.68,21.8 v27.3,21.8
  3.3V/Vert 0.127: v27.3,21.8 27.3,28.64 v27.36,28.7
  Bottom/Vert 0.127: U12.3 v27.36,28.7 27.3,28.7 26.85,29.15 R1.2
ESP_15/MTDO/RADIO_!RESET!  (via drill 0.2)
  Top/Horz 0.127: v29.3,24.5 29.3,29.82 30.75,31.27 J10.5 | U5.23 12.46,25.47 v12.46,23.7
  GND/Horz 0.127: v29.3,24.5 28.5,23.7 v12.46,23.7 | J9.6 9.38,19 9.72,19.34 12.44,19.34 v12.5,19.4
  3.3V/Vert 0.127: v12.46,23.7 12.5,23.66 v12.5,19.4
ESP_16/ZED-TXO1  (via drill 0.2)
  Top/Horz 0.127: U1.12 17.36,26.73 17.02,26.39 17.02,23.82 14.74,21.54 U5.27 8.72,21.5 v7,21.5 | v55.5,8 55.5,9.64 55.8,9.94 55.8,12.35 R3.2
  GND/Horz 0.127: v55.5,8 47.32,8 47.27,7.94 34.61,7.94 33.77,8.78 33.75,8.75 23.94,8.75 23.42,8.23 7.2,8.23 7.03,8.4 v7,8.4
  3.3V/Vert 0.127: v7,8.4 v7,21.5
ESP_17/ZED-RXI1  (via drill 0.2)
  Top/Horz 0.127: U1.1 22.45,32.15 21.8,31.5 21.8,27.1 22.06,26.84 22.06,23.96 18.37,20.27 U5.28 6.67,20.27 v6.5,20.1 | R9.P5 56.98,19.08 56.64,18.74 56.64,12.04 56.1,11.5 v56.1,7.7
  GND/Horz 0.127: v56.1,7.7 56.06,7.66 34.57,7.66 33.71,8.52 27.17,8.52 26.99,8.34 23.86,8.34 23.52,8 v6,8
  3.3V/Vert 0.127: v6,8 6.37,8.37 6.37,19.97 v6.5,20.1
ESP_18/SD_SCK  (via drill 0.2)
  Top/Horz 0.127: J8.7 38.75,36.35 v38.9,36.5 | v9.86,17.7 9.83,17.73 U5.30
  GND/Horz 0.127: v38.9,36.5 38.47,36.07 31.89,36.07 31.48,35.66 27.19,35.66 26.91,35.94 14.47,35.94 13.72,35.19 v8.24,35.19
  3.3V/Vert 0.127: v9.86,17.7 8.8,18.76 8.8,29.38 8.26,29.93 8.26,35.17 v8.24,35.19
ESP_19/SD_CIPO  (via drill 0.2)
  Top/Horz 0.127: J8.8 38.25,36.45 v38.3,36.5 | v9.86,16.5 9.82,16.46 U5.31
  GND/Horz 0.127: v38.3,36.5 38.1,36.3 31.8,36.3 31.39,35.89 27.29,35.89 27,36.17 14.38,36.17 14.04,35.83 8.47,35.83 v7.8,36.5
  3.3V/Vert 0.127: v7.8,36.5 7.8,34.82 8.03,34.59 8.03,29.78 8.57,29.24 8.57,17.79 v9.86,16.5
ESP_21/SDA  (via drill 0.2)
  Top/Horz 0.127: R9.P6 57.3,20.6 57.5,20.4 57.5,15.7 v57.1,15.3 | v37.25,37.55 J8.10 | JP1.1 17.59,29.59 18,30 21,30 21.2,30.2 21.2,33.8 U1.2 22.18,34.8 v22.3,34.8 22.25,34.85 J18.4 | U5.33 11.62,13.92 v12.9,15.2
  GND/Horz 0.127: v17.8,26.7 17.78,26.7 17.74,26.66 13.16,26.66 12.9,26.92 v12.9,27.1 | v57.1,15.3 40.86,15.3 v40.9,15.26 23.71,15.26 23.39,15.57 13.27,15.57 13,15.3 v12.9,15.2 | v17.6,37.5 v22,37.5 22.1,37.5 22.26,37.66 37.04,37.66 37.15,37.55 v37.25,37.55
  3.3V/Vert 0.127: v17.6,37.5 17.6,26.9 v17.8,26.7 | v12.9,27.1 v12.9,15.2 v12.9,10.5 | v22,37.5 22.07,37.5 22.3,37.27 v22.3,34.8
  Bottom/Vert 0.127: U7.8 40.67,12.25 41.13,12.71 41.13,15.03 v40.9,15.26 | v12.9,10.5 J1.3 16.35,10.5 16.85,10 17.15,10 R7.1
ESP_22/SCL  (via drill 0.2)
  Top/Horz 0.127: R9.P7 57.5,21.4 57.6,21.5 57.6,22.8 56.3,24.1 v56.2,24.1 | J8.9 37.75,37.45 v37.8,37.5 | J18.3 22.75,36.45 23,36.7 23.7,36.7 v24.3,37.3 | U5.36 10.01,10.11 v10.1,10.2 | JP2.1 10,31.8 9.7,31.5 8.9,31.5 8.6,31.2 8.6,28.2 9.1,27.7 v9.9,27.7 | U1.15 21,28.2 v20.5,27.7
  GND/Horz 0.127: v56.1,15.64 56.1,15.6 40.34,15.6 | 40.34,15.6 v40.3,15.64 | v37.8,37.5 37.8,37.4 37.6,37.2 24.4,37.2 v24.3,37.3 | v24,27.7 v20.5,27.7 v9.9,27.7 | v10.1,15.6 12.98,15.6 13.18,15.8 23,15.8 23.1,15.8 23.5,15.8 23.8,15.5 40.24,15.5 40.34,15.6
  3.3V/Vert 0.127: v10.1,10.2 v10.1,15.6 10.2,15.7 10.2,27.42 9.92,27.7 v9.9,27.7 | v56.2,24.1 56.2,15.74 v56.1,15.64 | v24.3,37.3 24.3,28 v24,27.7
  Bottom/Vert 0.127: U7.7 40.75,12.75 40.9,12.9 40.9,14.74 40.3,15.34 v40.3,15.64 | v10.1,10.2 11.4,11.5 J1.4 16.9,11.5 17.4,11 R12.1
ESP_23/SD_COPI  (via drill 0.2)
  Top/Horz 0.127: J8.6 39.25,34.95 v39.3,34.9 | v9.9,8.9 9.84,8.84 U5.37
  GND/Horz 0.127: v39.3,34.9 38.5,35.7 31.9,35.7 31.63,35.43 27.1,35.43 26.82,35.71 14.67,35.71 13.75,34.8 v6.9,34.8
  3.3V/Vert 0.127: v6.9,34.8 7.8,33.9 7.8,29.68 8.34,29.14 8.34,25.86 8.25,25.77 8.25,10.55 v9.9,8.9
ESP_25/SD_!CS!  (via drill 0.2)
  Top/Horz 0.127: U5.10 v31.32,19 | v39.7,36.5 39.75,36.45 J8.5
  GND/Horz 0.127: v39.7,36.5 39.68,36.5 39.34,36.84 37.76,36.84 37.45,36.53 31.37,36.53 v31.3,36.46
  3.3V/Vert 0.127: v31.3,36.46 31.32,36.44 v31.32,19
ESP_26/DAC2  (via drill 0.2)
  Top/Horz 0.127: v23.4,20.3 23.43,20.27 U5.11 | v15.7,27.2 16.09,27.59 U1.11
  GND/Horz 0.127: v23.4,20.3 16.6,20.3 v16.1,20.8
  3.3V/Vert 0.127: v16.1,20.8 16.1,26.8 v15.7,27.2
ESP_27/FAST_OFF  (via drill 0.2)
  Top/Horz 0.127: U5.12 22.54,21.54 v22.5,21.5
  GND/Horz 0.127: v22.5,21.5 8,21.5 7.5,21 v5.67,21
  Bottom/Vert 0.127: C20.2 6,25.15 6,21.33 v5.67,21
  Bottom/Vert 0.178: Q3.G1 4.4,30.2 4.1,29.9 4.1,25.85 | R24.1 4.1,25.85 | 4.1,25.85 5,25.85 C20.2
ESP_32/RADIO_TXO  (via drill 0.2)
  Top/Horz 0.127: J10.11 27.75,36.41 v27.7,36.46 | v27.8,16.2 27.54,16.46 U5.8
  3.3V/Vert 0.127: v27.8,16.2 27.72,16.28 27.7,16.28 v27.7,36.46
ESP_33/RADIO_RXI  (via drill 0.2)
  Top/Horz 0.127: J10.10 28.25,36.41 v28.3,36.46 | v28.4,18.1 28.03,17.73 U5.9
  3.3V/Vert 0.127: v28.3,36.46 28.3,18.2 v28.4,18.1
ESP_DM
  Bottom/Vert 0.127: U8.3 24,32 25.1,30.9 25.1,26.6 27.91,23.8 U6.6
ESP_DP
  Bottom/Vert 0.127: U8.4 23.9,31.5 24.8,30.6 24.8,26.54 26.64,24.7 U6.5
ESP_I34/RADIO_INT  (via drill 0.2)
  Top/Horz 0.127: J10.7 v29.75,36.45 v29.75,36.46 | v29.14,13.57 28.79,13.92 U5.6
  3.3V/Vert 0.127: v29.75,36.46 29.75,24.14 29.66,24.04 29.66,14.09 v29.14,13.57
ESP_I35/DEVICE_SENSE  (via drill 0.2)
  Top/Horz 0.127: U5.7 24.95,15.19 v24.2,14.44 | v5,14.4 5,13 4.15,12.15 R34.1 R33.2
  GND/Horz 0.127: v5,14.4 12.6,14.4 13.54,15.34 23.3,15.34 v24.2,14.44
ESP_I36/RADIO_RTSO  (via drill 0.2)
  Top/Horz 0.127: J10.9 28.75,36.41 v28.8,36.46 | v29,11.8 28.77,11.56 27.43,11.56 27.25,11.38 U5.4
  3.3V/Vert 0.127: v28.8,36.46 28.8,30.28 28.66,30.14 28.66,29.86 28.8,29.72 28.8,12 v29,11.8
ESP_I39/ADC39  (via drill 0.2)
  Top/Horz 0.127: v23.2,12 23.85,12.65 U5.5 | U1.4 18.64,30.66 18.8,30.5 v20.7,30.5
  GND/Horz 0.127: v23.2,12 v18.61,12 v18.6,11.99
  3.3V/Vert 0.127: v20.7,30.5 19.3,30.5 18.6,29.8 v18.6,11.99
EXTERNAL_SERIAL1_RXI  (via drill 0.2)
  Top/Horz 0.127: J18.1 23.75,34.45 24.2,34 v24.7,34 | U1.3 20.11,34 v20.5,34
  GND/Horz 0.127: v20.5,34 v24.7,34
EXTERNAL_SERIAL1_TXO  (via drill 0.2)
  Top/Horz 0.127: U1.13 18.64,29.34 18.95,29.65 v20.7,29.65 | J18.2 23.25,30.25 v23,30
  GND/Horz 0.127: v20.7,29.65 20.77,29.72 22.8,29.72 23,29.92 v23,30
FENCE_LV
  Top/Horz 0.127: U3.19 R4.P8
GND  (via drill 0.2)
  Top/Horz 0.178: U1.6 16.09,31.09 v16,31
  Bottom/Vert 0.127: U10.5 35,3.6 35.4,4 U10.11 | U7.6 39.25,13.25 U7.9 | R30.1 32.15,6.1 R6.1 31.04,7.5 J14.2 | R10.1 34.15,0.95 v34.2,1
  Bottom/Vert 0.305: U8.11 18.5,29.76 18.26,30 v17,30
  other vias: 9,31 11,28.1 16,30 17,31 12.9,33.8 12.9,34.4 9.3,36.4 12,39.4 20.1,38.7 23.8,37.3 27.3,33 25.8,31.8 29,30 22.2,27.2 8,29 3.5,35.3 5.3,34.6 6.9,7.5 10.1,7.6 24,8 26.4,8 29,10.4 30,16 32,16 33,11.5 37,14.8 38.8,14.8 42,12 44,12 47,12 49.2,9.4 52,12 49,5 43,5 38,6 15.6,13.1 15.6,14.9 16.6,14.9 16.7,13 19.4,14 20.4,17.1 18,17.2 16.7,17.2 15.5,17.2 30,23.9 32,32 47.8,37 47.5,36.5 48.6,35.5 49.1,35.1 51,35.1 51.5,35.6 52.2,37 52.2,36.3 52.2,37.8 49,33.6 51.1,33.6 52,33.6 53,33.6 54,33.6 55,33.6 55,32.3 47,33.6 45.2,33.6 43.5,33.6 42,33.6 40.2,33.6 38.7,33.6 37,33.6 35.7,33.6 34,33.6 32.7,33.6 32.8,32.4 32.9,31.5 32.9,30.4 32.9,29.3 32.9,28.5 33,17.7 33.2,16.7 34.5,16.4 36,16.4 37,16.3 38,16.3 39,16.3 40,16.3 41,16.3 44.9,16.4 46.5,16.4 51.1,16.4 52,16.5 53,16.5 54,16.5 55,16.5 55,17.4 50.3,19.8 48.2,19.8 46.1,19.8 44,19.8 41.9,19.8 39.8,19.8 37.7,19.8 35.5,19.8 52.5,19.8 50.3,30.7 48.2,30.7 46.1,30.7 44,30.7 41.9,30.7 39.8,30.7 37.7,30.7 35.5,30.7 52.5,30.7 50.3,29.8 48.2,29.8 46.1,29.8 44,29.8 41.9,29.8 39.8,29.8 37.7,29.8 35.5,29.8 52.5,29.8 50.3,28.8 48.2,28.8 46.1,28.8 44,28.8 41.9,28.8 39.8,28.8 37.7,28.8 35.5,28.8 52.5,28.8 50.3,27.8 48.2,27.8 46.1,27.8 44,27.8 41.9,27.8 39.8,27.8 37.7,27.8 35.5,27.8 52.5,27.8 50.3,26.8 48.2,26.8 46.1,26.8 44,26.8 41.9,26.8 39.8,26.8 37.7,26.8 35.5,26.8 52.5,26.8 50.3,25.8 48.2,25.8 46.1,25.8 44,25.8 41.9,25.8 39.8,25.8 37.7,25.8 35.5,25.8 52.5,25.8 50.3,24.8 48.2,24.8 46.1,24.8 44,24.8 41.9,24.8 39.8,24.8 37.7,24.8 35.5,24.8 52.5,24.8 50.3,23.8 48.2,23.8 46.1,23.8 44,23.8 41.9,23.8 39.8,23.8 37.7,23.8 35.5,23.8 52.5,23.8 50.3,22.8 48.2,22.8 46.1,22.8 44,22.8 41.9,22.8 39.8,22.8 37.7,22.8 35.5,22.8 52.5,22.8 50.3,21.8 48.2,21.8 46.1,21.8 44,21.8 41.9,21.8 39.8,21.8 37.7,21.8 35.5,21.8 52.5,21.8 50.3,20.8 48.2,20.8 46.1,20.8 44,20.8 41.9,20.8 39.8,20.8 37.7,20.8 35.5,20.8 52.5,20.8 50.3,18.8 48.2,18.8 46.1,18.8 44,18.8 41.9,18.8 39.8,18.8 37.7,18.8 35.5,18.8 52.5,18.8 50.3,31.3 48.2,31.3 46.1,31.3 44,31.3 41.9,31.3 39.8,31.3 37.7,31.3 35.5,31.3 52.5,31.3 34.5,17.4 36,17.4 52,17.5 53,17.5 54,17.5 35.5,32.8 34.5,32.8 33.5,32.8 52.5,32.8 53.5,32.8 54.5,32.8 46.5,37.6 45,37.6 43.2,37.6 45,35.6 45.5,36.6 44,36.6 43.5,35.6 42.5,34.6 41,34.6 46.5,35.6 56.5,34.6 55,34.6 53.2,34.6 51.7,34.6 57.5,37.6 56,37.6 54.2,37.6 52.7,37.6 56,35.6 56.5,36.6 55,36.6 53.2,36.6 54.5,35.6 53,35.6 57.5,35.6 39,11.8 36,4 35,4 37,4 34,4 34,3 34,2.4 47.8,37.7 47.8,38.4 48.5,38.4 49.1,38.4 51,38.4 51.6,38.5 52.4,38.4 34,35 32.6,34.8 42.5,36.6 17.5,39
  pour Top/Horz (isolate 0.152, rank 4): 0,41 60,41 60,0 0,0
  pour Bottom/Vert (isolate 0.152, rank 4): 0,41 60,41 60,0 0,0
  pour GND/Horz (isolate 0.152, rank 4): 0,41 60,41 60,0 0,0
  cutout Top/Horz (isolate 0.305): 0,6.5 33,6.5 33,0 0,0
  cutout GND/Horz (isolate 0.305): 0,6.5 33,6.5 33,0 0,0
  cutout Bottom/Vert (isolate 0.305): 0,6.5 33,6.5 33,0 0,0
  cutout 3.3V/Vert (isolate 0.305): 0,6.5 33,6.5 33,0 0,0
  cutout Top/Horz (isolate 0.305): 49,38 51,38 51,36 49,36
GPS_ANT1
  Top/Horz 0.33: U3.2 50.05,34.35 | FB1.1 J2.FEED
  Top/Horz 0.35: 50.05,34.35 FB1.1
LIPO_RAW
  Bottom/Vert 0.127: MEAS2.1 MEAS2.3
  Bottom/Vert 0.559: J7.2 39.27,11 MEAS2.3
N$1
  Bottom/Vert 0.127: R8.1 33.9,9 34.6,8.3 34.6,6.97 34.97,6.6 35.3,6.6 36,5.9 U10.8
N$2
  Top/Horz 0.127: R11.1 4.03,26.85 D1.A
N$3
  Bottom/Vert 0.127: JP7.3 19.89,8.96 R7.2
N$4
  Bottom/Vert 0.127: R12.2 21.96,11 JP7.1
N$5
  Top/Horz 0.127: U3.51 55.58,28.3 R2.P2
N$6  (via drill 0.2)
  Top/Horz 0.178: v5.1,29 5.1,32 | 5.1,32 5.1,32.73 v5.37,33.01 | v9,32 5.1,32
  Bottom/Vert 0.178: C23.2 C22.1 4.53,33.85 v5.37,33.01 | v9,32 R26.1 7.85,31.1 Q3.G2 | Q3.D1 5.05,28.95 v5.1,29
N$7
  Bottom/Vert 0.127: C9.2 18.4,37.85 18.25,38 Y1.3 16.85,37.83 R13.2 17.5,36.15 U8.33
N$8
  Bottom/Vert 0.127: U8.32 17,35.5 16.6,35.9 16,35.9 15.1,36.8 R13.1 14.5,36.8 14.4,36.9 14.4,37.2 | 14.4,37.2 14.4,38.8 14.6,39 Y1.1 | C19.2 13.65,37.2 14.4,37.2
N$9
  Bottom/Vert 0.127: U8.35 18.5,35.3 19.3,36.1 22,36.1 23,37.1 R5.1
N$10
  Bottom/Vert 0.127: U8.28 15,34.3 14.7,34.6 14.4,34.6 12.8,36.2 12.8,37.55 R16.2
N$11
  Top/Horz 0.127: U3.40 50.05,15.8 R27.2
N$12
  Top/Horz 0.127: U3.39 49,17.5 R28.2
N$13
  Top/Horz 0.305: 44.55,34.3 R14.2
  Top/Horz 0.33: U3.7 44.55,34.3
N$14
  Bottom/Vert 0.127: U8.25 13.2,32 12.6,31.4 12.6,30.2 11.9,29.5 R17.2
N$15
  Bottom/Vert 0.127: C21.1 19.95,37.16 18,35.2 U8.34
N$16
  Top/Horz 0.127: U3.49 55,26.1 55.68,26.78 R2.P4
N$17
  Bottom/Vert 0.127: U8.14 17,26.15 C24.1
N$18
  Top/Horz 0.127: U3.50 54.9,27.2 55.3,27.6 R2.P3
N$19  (via drill 0.2)
  GND/Horz 0.127: v16,34.8 16.04,34.84 19.34,34.84 19.78,34.4 v25,34.4
  Bottom/Vert 0.127: v25,34.4 25.14,34.26 25.14,33.86 24.78,33.5 R25.2 | v16,34.8 U8.30
N$20  (via drill 0.2)
  GND/Horz 0.127: v24.8,35.1 24.38,35.1 24.24,35.24 16.54,35.24 v16.5,35.2
  Bottom/Vert 0.127: R32.2 v24.8,35.1 | v16.5,35.2 U8.31
N$21  (via drill 0.2)
  Top/Horz 0.127: v13.5,30.4 JP1.2
  Bottom/Vert 0.127: U8.22 13.6,30.5 v13.5,30.4
N$22
  Top/Horz 0.127: U3.46 54.8,22.8 55.4,22.2 R9.P1
N$23  (via drill 0.2)
  Top/Horz 0.127: v13.5,31.6 12.9,31.6 11.09,33.41 JP2.2
  Bottom/Vert 0.127: U8.24 13.6,31.5 v13.5,31.6
N$24
  Bottom/Vert 0.127: Q2.5 23,14.4 23.3,14.1 25.25,14.1 R23.2
N$25
  Bottom/Vert 0.127: R29.2 21.65,13.8 22.9,13.8 23,13.7 Q2.2
POWER_BTN  (via drill 0.2)
  Top/Horz 0.127: J8.2 41.25,37.95 v41.3,38
  Top/Horz 0.178: v9.3,34 3.8,34 3,33.2 v3,31
  GND/Horz 0.127: v3.1,37.5 16.98,37.5 17.43,37.95 27.04,37.95 27.06,37.93 41.2,37.93 41.27,38 v41.3,38
  3.3V/Vert 0.127: v3.1,37.5 3.1,31.1 v3,31
  Bottom/Vert 0.178: C23.1 v3,31 D4.C | R31.1 v9.3,34
PPS
  Top/Horz 0.127: U3.53 54.5,30.5 55.68,29.32 R2.P1
PROG1
  Bottom/Vert 0.127: U10.6 34.15,5.45 33.85,5.75 R6.2
RTK_LV
  Top/Horz 0.127: U3.20 31.98,26.1 R4.P7
RX2_LV
  Top/Horz 0.127: U3.26 32.8,19.5 32.7,19.6 32.7,24.52 32.84,24.66 32.84,25.46 32.7,25.6 R4.P6
RXLV
  Top/Horz 0.127: U3.43 54.9,19.5 55.2,19.8 R9.P4
SCL_LV
  Top/Horz 0.127: U3.45 54.9,21.7 55.2,21.4 R9.P2
SDA_LV
  Top/Horz 0.127: U3.44 R9.P3
TX2_LV
  Top/Horz 0.127: R4.P5 32,24.8 32.4,24.4 32.4,18.8 32.8,18.4 U3.27
TXLV
  Top/Horz 0.127: U3.42 55.1,18.4 55.6,17.9 55.6,16.3 55,15.7 R3.1
USB_!RESET
  Bottom/Vert 0.127: U8.26 R18.1 C28.1
USB_DM  (via drill 0.2)
  Top/Horz 0.127: J18.8 20.25,35.15 v20,34.9
  Bottom/Vert 0.127: v20,34.9 20,33.8 20.3,33.5 R25.1
USB_DP  (via drill 0.2)
  Top/Horz 0.127: v20.54,34.86 20.75,35.07 J18.7
  Bottom/Vert 0.127: v20.54,34.86 20.78,35.1 R32.1
V_BATT  (via drill 0.2)
  Top/Horz 0.305: U4.1 51.2,9.05 | 51.2,9.05 51.9,9.05 C17.1 | U4.3 51.05,10.95 51.2,10.8 51.2,9.05
  Top/Horz 0.559: U4.1 50.3,7.9 49.9,7.5 36.7,7.5 35.73,8.47 MEAS2.4
  GND/Horz 0.305: v5.6,12 18,12 18.43,12.43 33.3,12.43 MEAS2.4
  3.3V/Vert 0.305: v5.6,12 5.68,12.08 5.68,20.12 6.1,20.54 v6.1,38.1
  Bottom/Vert 0.305: D7.A 5.05,38.1 v6.1,38.1 | 36,12 C15.1 36.05,12.1 36.8,12.1 37,12.3 37,12.7 | MEAS2.2 MEAS2.4 | U7.3 37.15,13.25 37,13.1 37,12.7 | 37,12.7 37.05,12.75 U7.2 | U10.9 36.5,6.85 C3.1 37,7.35 U10.10
  Bottom/Vert 0.559: 36,12 36,10.27 MEAS2.4 35.73,8.97 37.15,7.55 C3.1
V_RAW  (via drill 0.2)
  GND/Horz 0.305: v7.7,6.5 25.6,6.5 27.3,8.2 33.5,8.2 38,3.7 v38,1
  3.3V/Vert 0.305: v7.7,6.5 7.7,15.69 7.93,15.92 7.93,22.68 7,23.61 v7,33
  Bottom/Vert 0.305: Q3.S2 6,31 6.15,31.15 R26.2 | R26.2 6.15,33 | 6.15,33 R31.2 6.15,35.8 6.1,35.85 | D7.C 6.1,35.85 | 6.1,35.85 D2.C | C22.2 6,32.15 R26.2 | U10.2 36.5,1.35 C16.1 | U10.1 37,1.15 C16.1 | 6.15,33 v7,33 | v38,1 C16.1
V_USB  (via drill 0.2)
  Top/Horz 0.305: J15.1 14.75,37.85 14.6,38 14.2,38 | 14.2,38 13.7,38 | 13.7,38 13.3,38 13.25,37.95 | J15.2 14.25,37.95 14.2,38 | J15.3 13.75,37.95 13.7,38 | J15.4 13.25,37.95 | v36.3,34.9 36.25,34.95 J8.12 | 13.25,37.95 13.12,37.95 v12.8,38.27
  GND/Horz 0.305: v36.3,38.3 36.27,38.27 27.2,38.27 v12.8,38.27 9.17,38.27 v8.9,38
  3.3V/Vert 0.305: v36.3,38.3 v36.3,34.9
  Bottom/Vert 0.305: D2.A 8.15,38 v8.9,38 8.75,37.85 8.75,35.2 9.94,34 R21.2
VBUS_DET
  Bottom/Vert 0.127: U8.27 12.85,33 R21.1 R19.2 C29.1
VOUT  (via drill 0.2)
  Top/Horz 0.305: J10.12 27.25,34.05 26.87,33.67 26.87,26.09 v26.96,26 | J15.9 10.75,37.3 | 10.75,37.3 10.75,39.45 v10.7,39.5 | 11.8,37.3 12,37.3 12.25,37.05 J15.6 | J15.7 11.75,37.25 11.8,37.3 | 11.8,37.3 11.3,37.3 | 11.3,37.3 10.75,37.3 | J15.8 11.25,37.25 11.3,37.3
  GND/Horz 0.305: v32.5,25.1 32.5,25.5 32,26 v26.96,26 v10.56,26 v8,26
  3.3V/Vert 0.305: v10.7,39.5 v10.69,39.5 10.57,39.38 10.57,26.01 v10.56,26
  Bottom/Vert 0.305: Q3.D2 6.95,26.1 C20.1 | C20.1 R22.2 | U2.1 32.05,13.95 32.3,14.2 33.95,14.2 | U2.3 33.95,14.2 | 33.95,14.2 33.95,14.9 C6.1 33.8,15 31.98,16.82 31.98,25.1 | U12.1 31.55,28.7 31.98,29.12 | 31.98,29.12 C27.1 | 31.98,25.1 31.98,29.12 | C20.1 v8,26 | v32.5,25.1 31.98,25.1
ZED-RXI2  (via drill 0.2)
  Top/Horz 0.127: J18.9 19.75,38.95 19.9,39.1 v30.4,39.1 | R4.P3 30.78,25.6 30.85,25.67 30.85,27.8 v30.65,28
  3.3V/Vert 0.127: v30.65,28 30.86,28.21 30.86,32.63 30.67,32.82 30.67,38.9 30.47,39.1 v30.4,39.1
ZED-TXO2  (via drill 0.2)
  Top/Horz 0.127: J18.10 19.25,39.02 19.71,39.48 30.72,39.48 v30.9,39.3 | R4.P4 v30.98,24.8
  3.3V/Vert 0.127: v30.98,24.8 31.09,24.91 31.09,32.73 30.9,32.92 v30.9,39.3
ZED_BACKUP
  Top/Horz 0.127: U3.36 45.65,12.35 46,12 C18.1 46.8,10.05 46.8,9.2 46.95,9.05 U4.5
ZED_DM  (via drill 0.2)
  Top/Horz 0.127: v49,12.1 R28.1
  GND/Horz 0.127: v26.8,9.9 27,9.7 33.5,9.7 34.8,8.4 47,8.4 49,10.4 v49,12.1
  3.3V/Vert 0.127: v26.2,32.9 26.3,32.9 26.56,32.64 26.56,10.14 v26.8,9.9
  Bottom/Vert 0.127: U8.1 20.37,33 20.64,32.73 26.03,32.73 v26.2,32.9
ZED_DP  (via drill 0.2)
  Top/Horz 0.127: R27.1 v51,12
  GND/Horz 0.127: v26.4,9.5 26.44,9.46 33.42,9.46 34.7,8.17 47.17,8.17 v51,12
  3.3V/Vert 0.127: v26.2,32.11 26.23,32.08 26.23,9.63 26.36,9.5 v26.4,9.5
  Bottom/Vert 0.127: U8.2 25.81,32.5 v26.2,32.11
ZED_EXTINT  (via drill 0.2)
  Top/Horz 0.127: R2.P7 57.3,28.4 57.6,28.7 v57.6,30.8 | U1.5 17.36,36.53 16.95,36.95 16.7,37.2 v16.7,39.7
  GND/Horz 0.127: v16.7,39.7 16.72,39.68 57.82,39.68 v57.9,39.6
  3.3V/Vert 0.127: v57.6,30.8 57.6,35.22 57.84,35.46 57.84,39.56 57.88,39.6 v57.9,39.6
ZED_PPS_STAT  (via drill 0.2)
  Top/Horz 0.127: R2.P8 56.98,30.18 v57,30.2 | U1.14 19.91,28.91 20.2,29.2 v21.2,29.2
  GND/Horz 0.127: v57,40.37 56.93,40.3 v21.2,40.3
  3.3V/Vert 0.127: v21.2,29.2 v21.2,40.3 | v57,30.2 v57,40.37
  Bottom/Vert 0.127: J4.2 57.24,12.24 58,13 58,29.2 v57,30.2
ZED_TX_READY  (via drill 0.2)
  Top/Horz 0.127: v55.7,23.5 56.3,23.5 56.98,22.82 R9.P8
  3.3V/Vert 0.127: v55.7,23.5 55.7,13.3 v56,13

## Text on the board
Top/Horz: v11
bPlace: + | -
tDocu: Board thickness is 1.6mm | 4 Layer Board | No clean process